# Altium PCB PCB2.PcbDoc
Units mm, origin at the board's own origin, x right, y up, seen from the top; angles counter-clockwise.
Board outline 50 x 50 mm, 2 copper layers (Top Layer, Bottom Layer); 12 components, 9 nets, 28 pads, 0 vias.
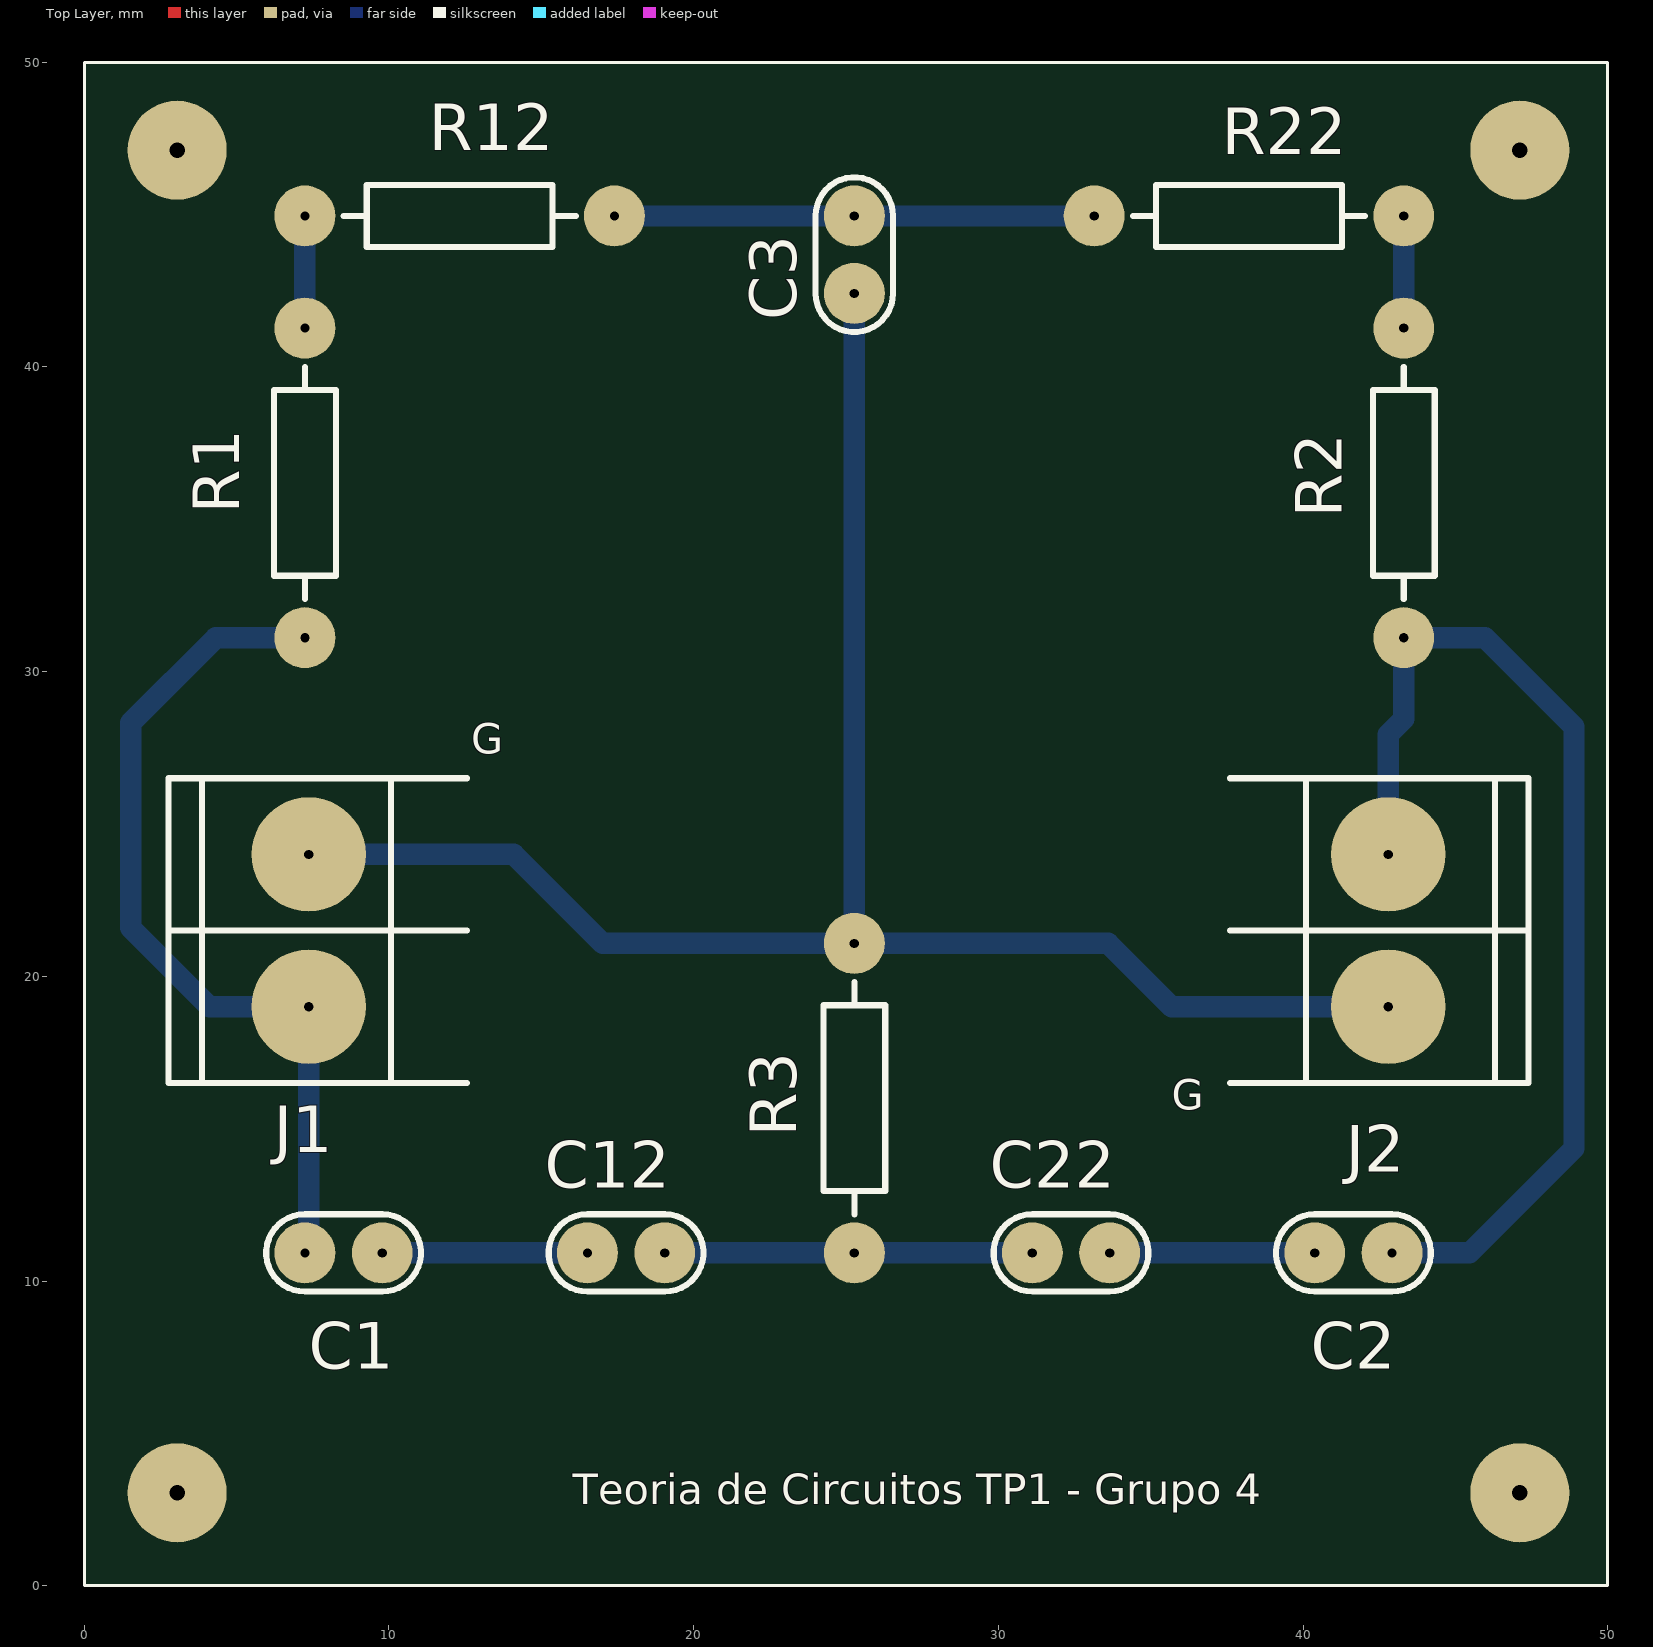
[diagram p0: Top Layer view]
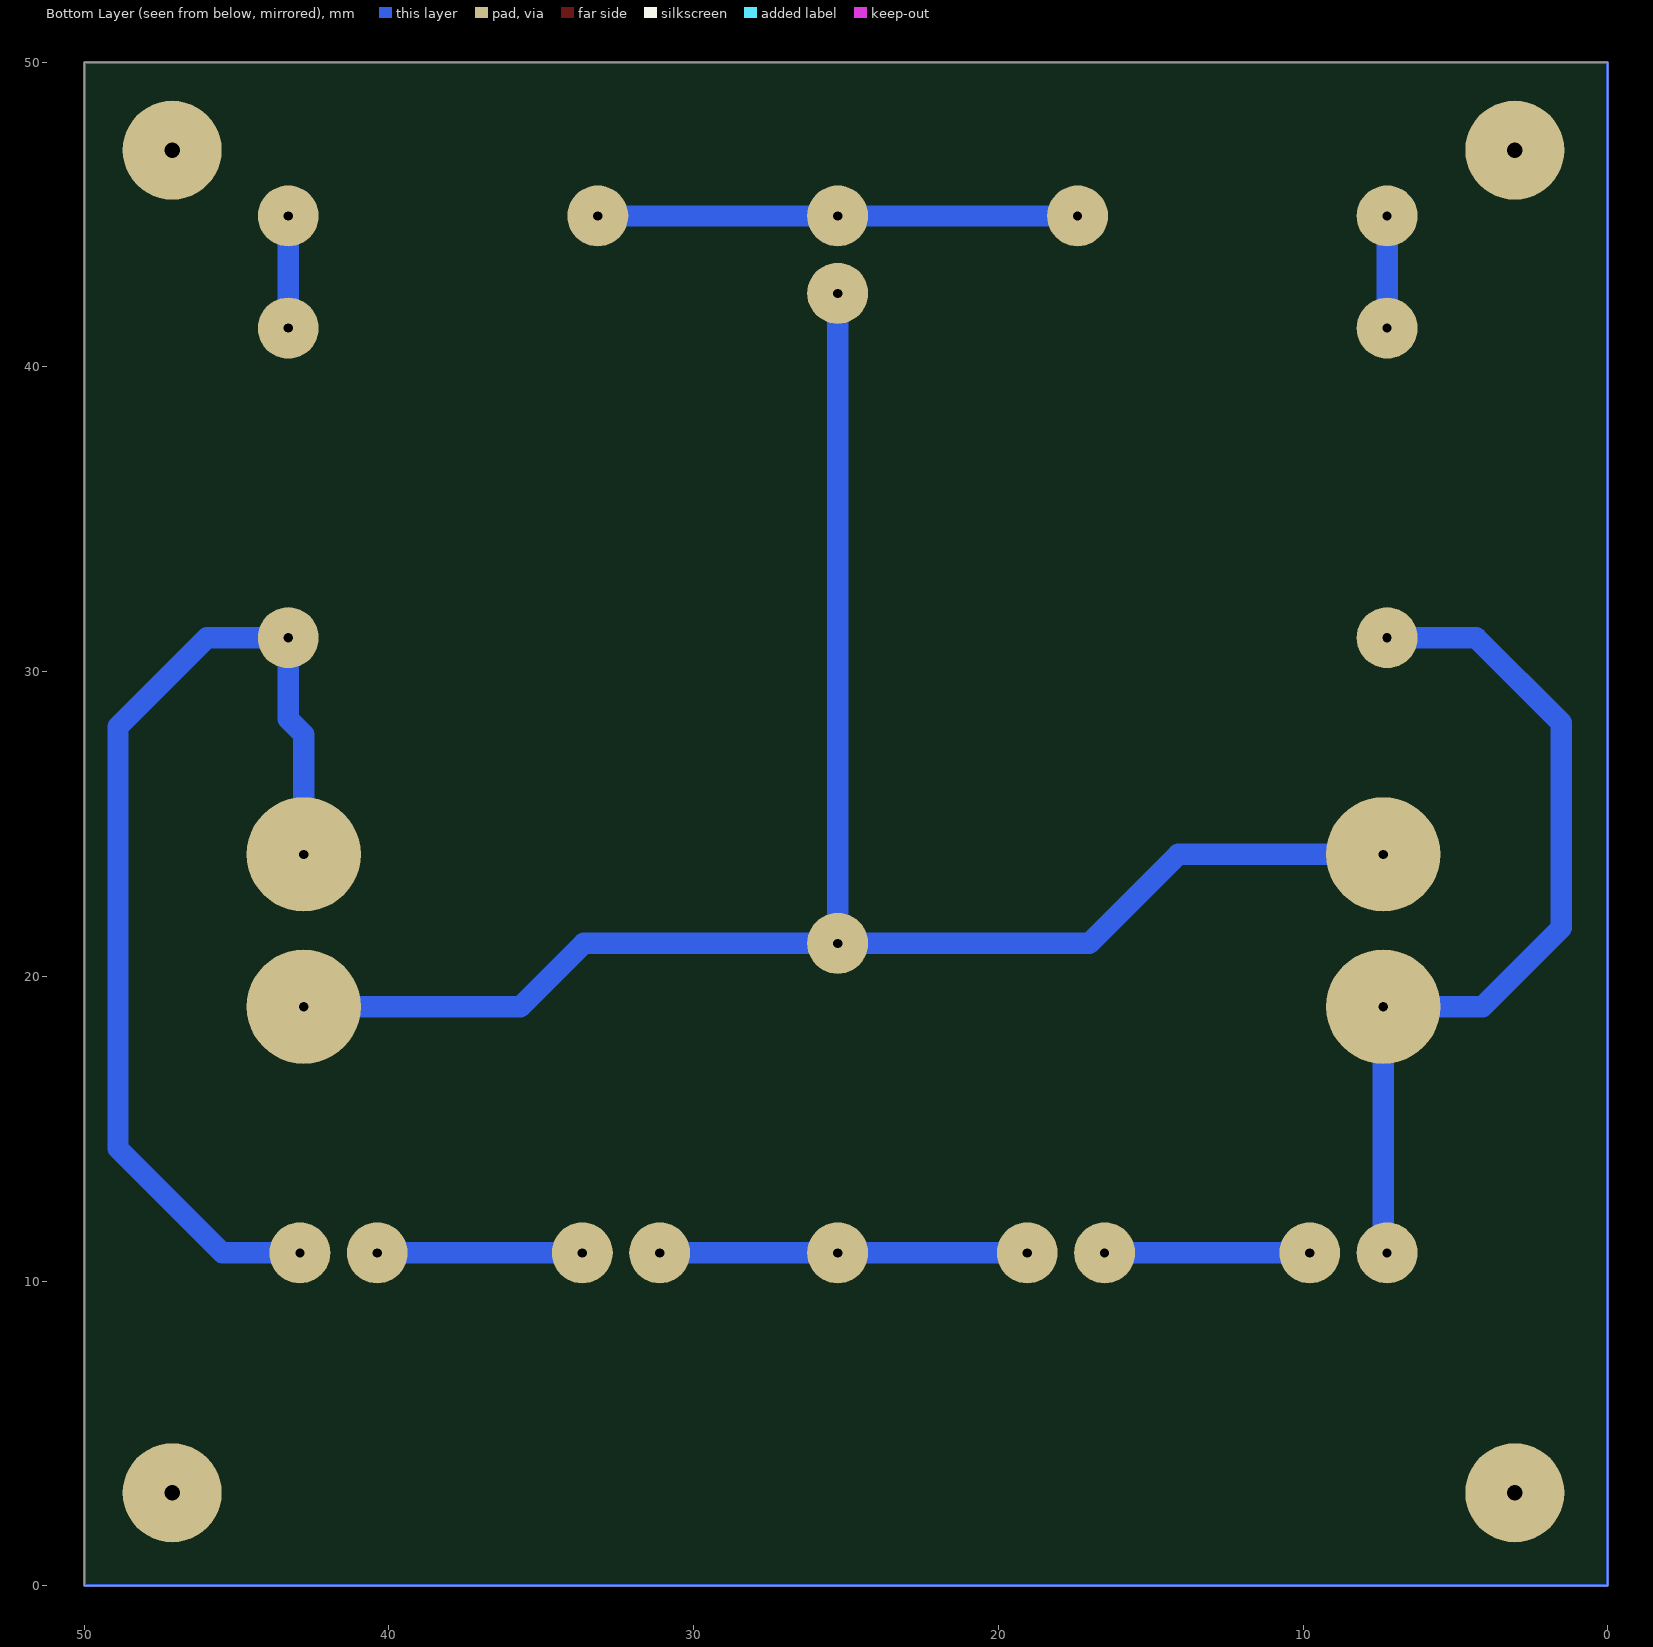
[diagram p1: Bottom Layer view, seen from below]
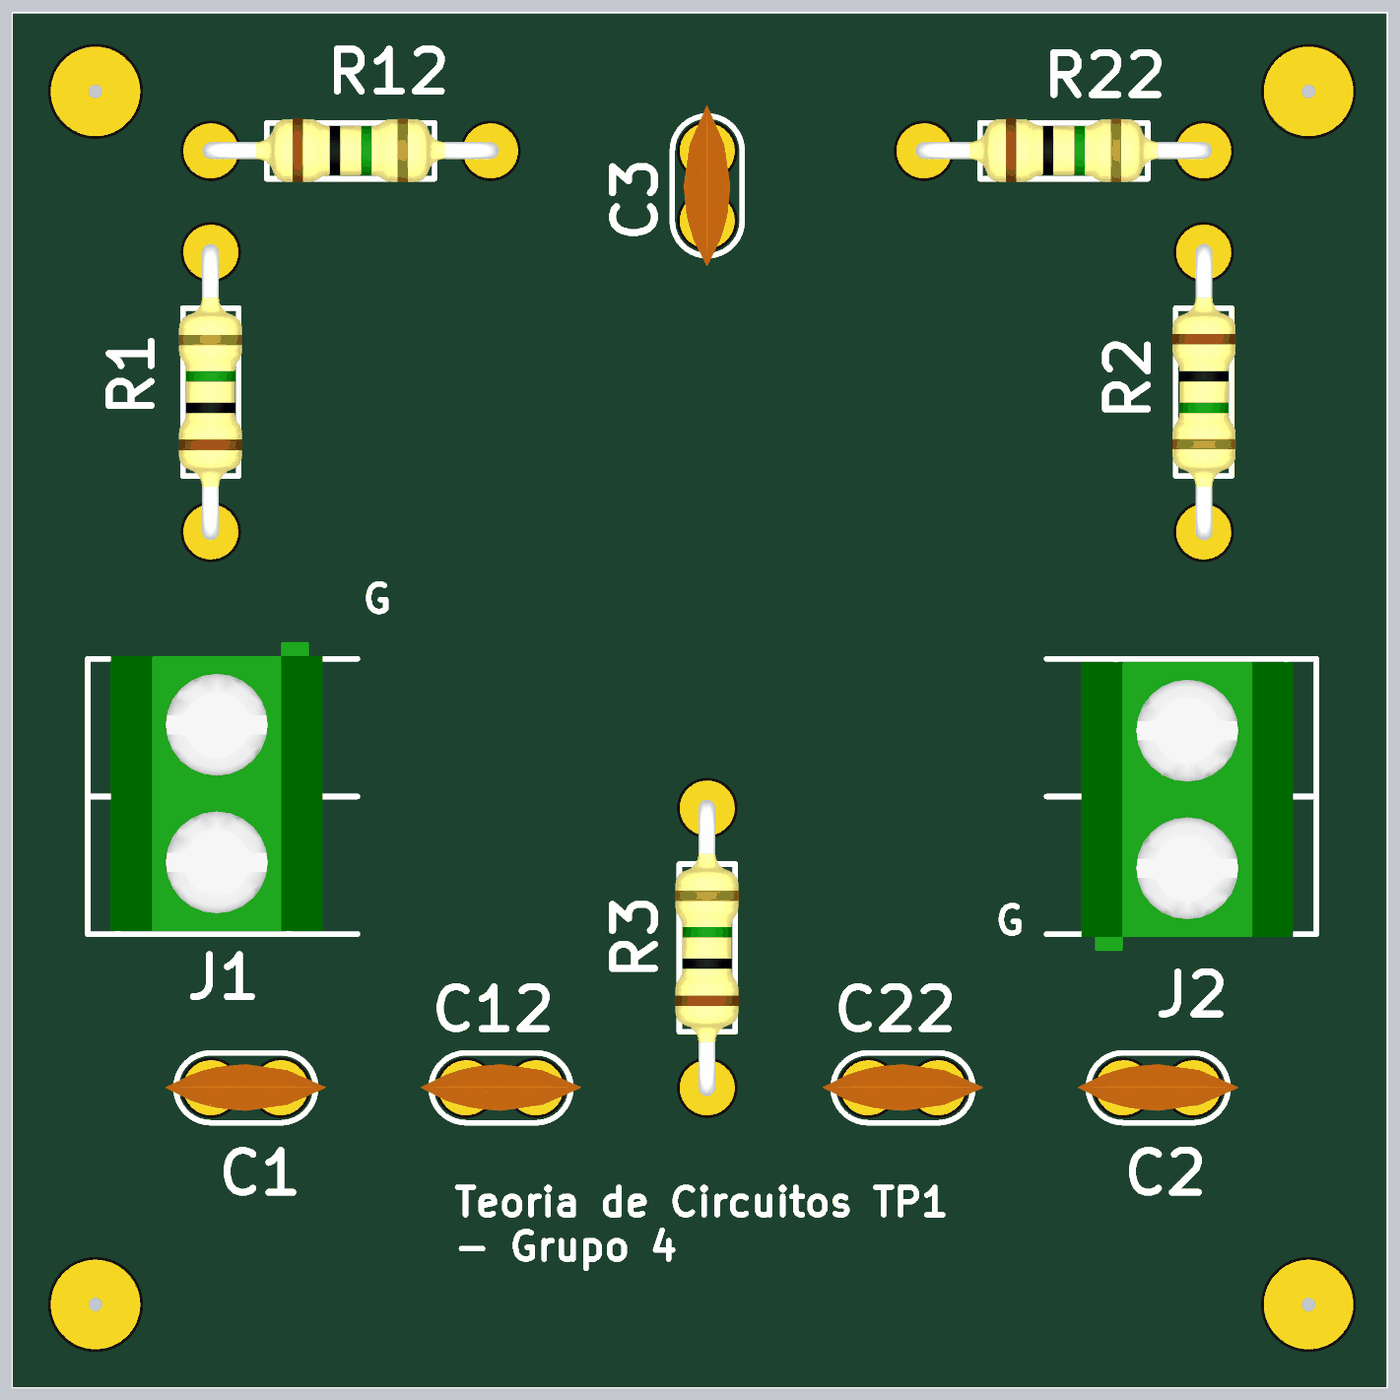
[diagram p2: 3D render of the assembled board from above, using the file's embedded part models]

## Layer stack, top to bottom
Top Solder: solder mask 0.0102, Solder Resist, Dk 3.5
Top Layer: signal copper 0.0356
Dielectric 1: dielectric 0.32, FR-4, Dk 4.8
Bottom Layer: signal copper 0.0356
Bottom Solder: solder mask 0.0102, Solder Resist, Dk 3.5

## Board outline
0,50 50,50 50,0 0,0

## Design rules (kind name [scope] priority, off if disabled: settings)
Clearance [All] p1: gap=0.4 ignorepadtopadclearanceinfootprint=FALSE
PolygonConnect [All] p1: connectstyle=Relief reliefconductorwidth=0.254 reliefentries=4 polygonreliefangle="90 Angle" airgapwidth=0.254
RoutingVias [All] p1: holewidth=0.4 width=2 viastyle="Through Hole" minholewidth=0.3 minwidth=2 maxholewidth=0.5 maxwidth=2
SolderMaskExpansion [All] p1: expansion=0.102
Width [All] p1: maxlimit=0.9 minlimit=0.6 preferedwidth=0.7
30 further rules are at their usual default settings.

## Components (designator, comment, footprint, x,y, rotation, side; value= is the part's Value field where it differs from the comment)
C1 "CAP" CAP100 8.509,10.922 r0 top
C2 "CAP" CAP100 41.656,10.922 r0 top
C3 "CAP" CAP100 25.273,43.688 r90 top
C12 "CAP" CAP100 17.78,10.922 r0 top
C22 "CAP" CAP100 32.385,10.922 r0 top
J1 "BORNERA 2" BORNERA2 7.366,21.503 r0 top
J2 "BORNERA 2" BORNERA2 42.799,21.503 r180 top
R1 "RES" RES400 7.239,31.115 r90 top
R2 "RES" RES400 43.307,41.275 r270 top
R3 "RES" RES400 25.273,10.922 r90 top (schematic designator R5)
R12 "RES" RES400 7.239,44.958 r0 top
R22 "RES" RES400 33.147,44.958 r0 top

## Footprints (in the part's own frame and the unit in brackets; to place one, negate y for a bottom-side part, rotate by r counter-clockwise, add the part's x,y. Pads: shape width x height; smd on the part's side, far side on the other; paste and mask are expansions set on the pad)
BORNERA2 [mm] "Bornera con Tornillos 5mm separación"
  round 3.75 hole 0.3: 1(0,2.5) 2(0,-2.5)
  silkscreen extent -4.6,-5 5.2,5, body extent -3.76,-4.89 3.94,5.61, height 10
CAP100 [mm]
  round 2 hole 0.3: 1(-1.27,0) 2(1.27,0)
  silkscreen extent -2.54,-1.27 2.54,1.27, body extent -2.92,-0.84 2.92,0.86, height 6.12
RES400 [mm]
  round 2 hole 0.3: 1(0,0) 2(10.16,0)
  silkscreen extent 1.27,-1.02 8.89,1.02, body extent -0.3,-1.14 10.46,1.17, height 2.43

## Free pads (board coordinates)
  round 3.25 hole 0.5: 1(3.048,3.048) 1(3.048,47.117) 1(47.117,3.048) 1(47.117,47.117)

## Nets (pads, with @x,y where several pads share a name; then routed paths per layer and width w, separated by ;. In a path a pad name is that pad's centre, name@x,y a point inside that pad or via, vN(x,y) a via of type N, cw(c..) or ccw(c..) an arc to the next point about the centre after c; other vN are vias at no path point)
GND: C3.1 J1.1 J2.1 R3.2 | length 58.8
  Bottom Layer w0.7: J1.1 14.097,24.003 17.018,21.082 R3.2 ; C3.1 R3.2 ; J2.1 35.687,19.003 33.608,21.082 R3.2
NetC1_1: C1.1 J1.2 R1.1 | length 28.7
  Bottom Layer w0.7: C1.1 7.366,11.049 J1.2 4.111,19.003 1.524,21.59 1.524,28.321 4.318,31.115 R1.1
NetC1_2: C1.2 C12.1 | length 6.7
  Bottom Layer w0.7: C1.2 C12.1
NetC2_1: C2.1 C22.2 | length 6.7
  Bottom Layer w0.7: C22.2 C2.1
NetC2_2: C2.2 J2.2 R2.2 | length 35.4
  Bottom Layer w0.7: J2.2 42.799,27.94 43.307,28.448 R2.2 45.974,31.115 48.895,28.194 48.895,14.351 45.466,10.922 C2.2
NetC3_2: C3.2 R12.2 R22.1 | length 15.7
  Bottom Layer w0.7: R12.2 C3.2 R22.1
NetC12_2: C12.2 C22.1 R3.1 | length 12.1
  Bottom Layer w0.7: C12.2 R3.1 C22.1
NetR1_2: R1.2 R12.1 | length 3.7
  Bottom Layer w0.7: R1.2 R12.1
NetR2_1: R2.1 R22.2 | length 3.7
  Bottom Layer w0.7: R2.1 R22.2
copper on no net: | length 400
  Bottom Layer w0.1: 0,0 0,50 ; 0,0 50,0 ; 0,0 0,50 ; 0,0 50,0 ; 0,50 50,50 ; 0,50 50,50 ; 50,0 50,50 ; 50,0 50,50

## Silkscreen, mask and mechanical layers (free items; w line width, h text height)
Top Overlay:
  lines w0.1: 0,0 0,50 ; 0,0 50,0 ; 0,0 0,50 ; 0,0 50,0 ; 0,50 50,50 ; 0,50 50,50 ; 50,0 50,50 ; 50,0 50,50
  text "G" at 12.7,27.305 h1
  text "G" at 35.687,15.621 h1
  text "Teoria de Circuitos TP1 - Grupo 4" at 16.029,2.667 h1
Mechanical 1:
  the board outline again, w0.1